# Altium PCB PCB2.PcbDoc
Units mil, origin at the board's own origin, x right, y up, seen from the top; angles counter-clockwise.
Board outline 6000 x 4000 mil, 2 copper layers (Top Layer, Bottom Layer); 53 components, 60 nets, 237 pads, 43 vias.
Unrouted connection lines stored in the file: 27.
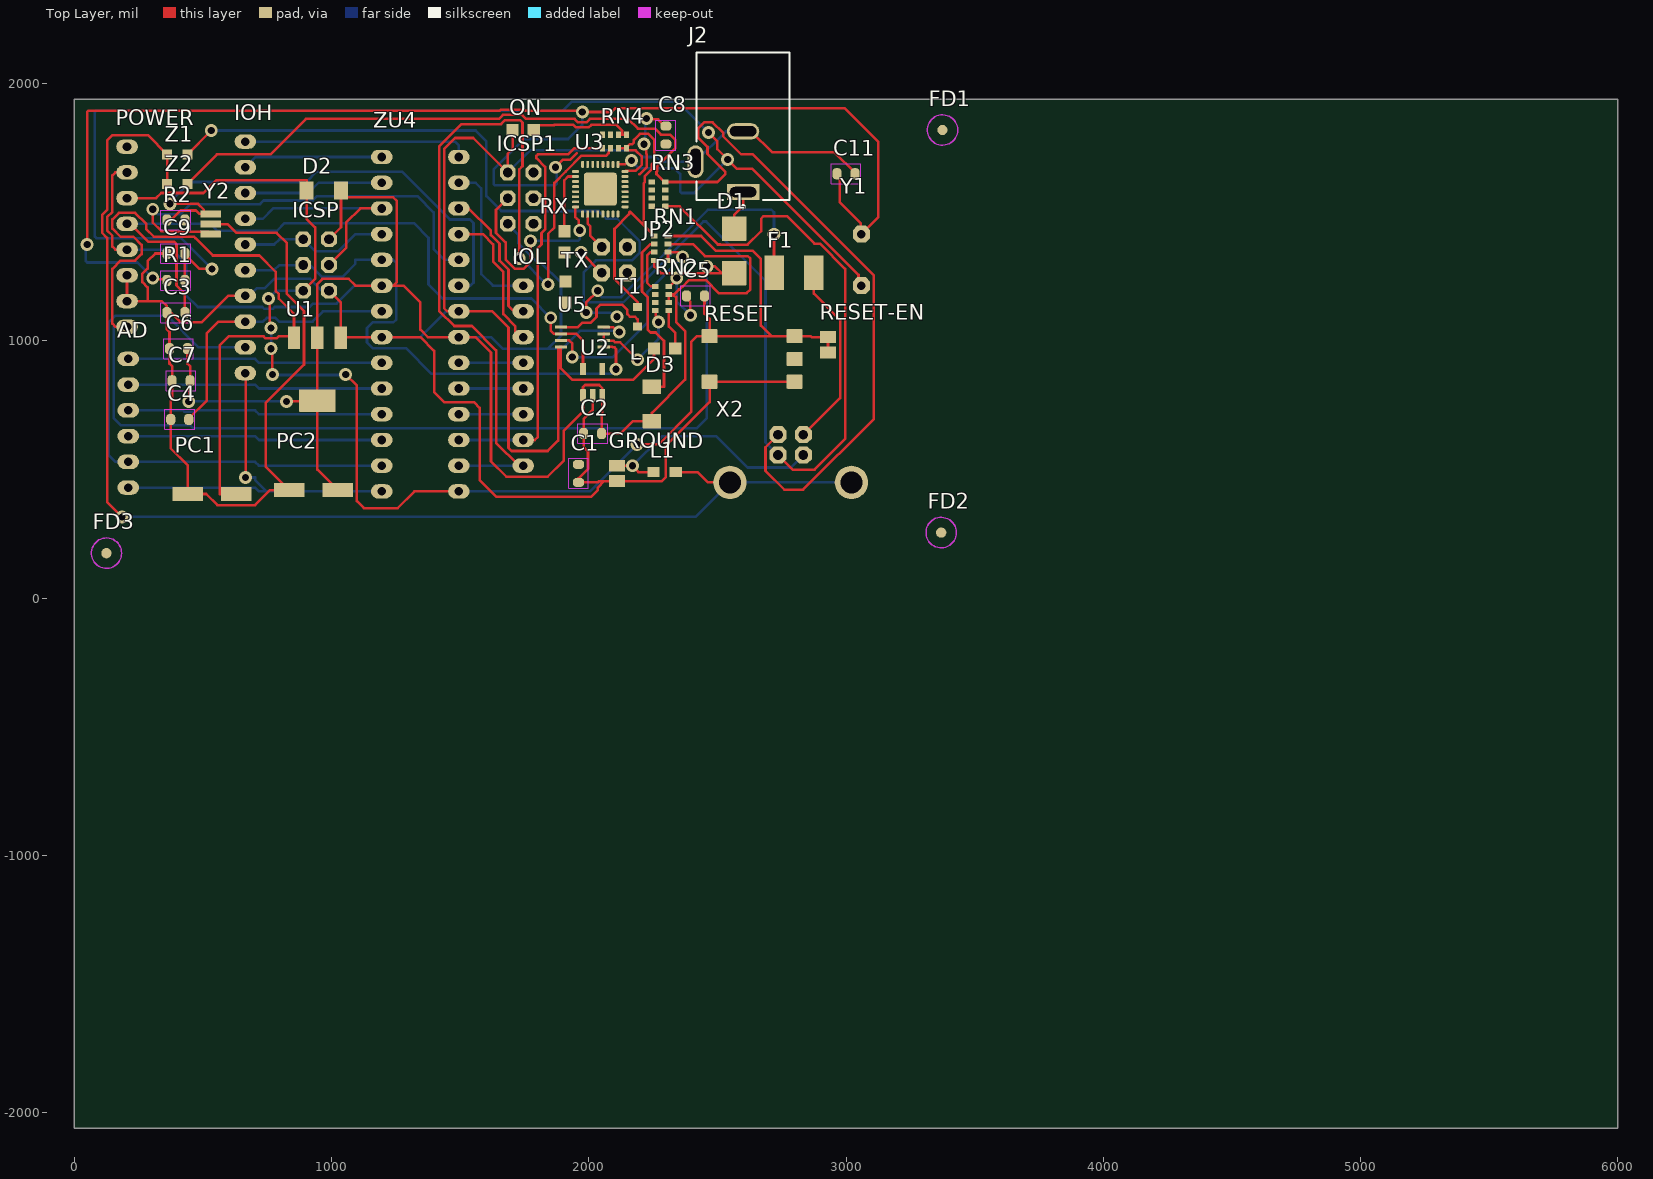
[diagram p0: Top Layer view]
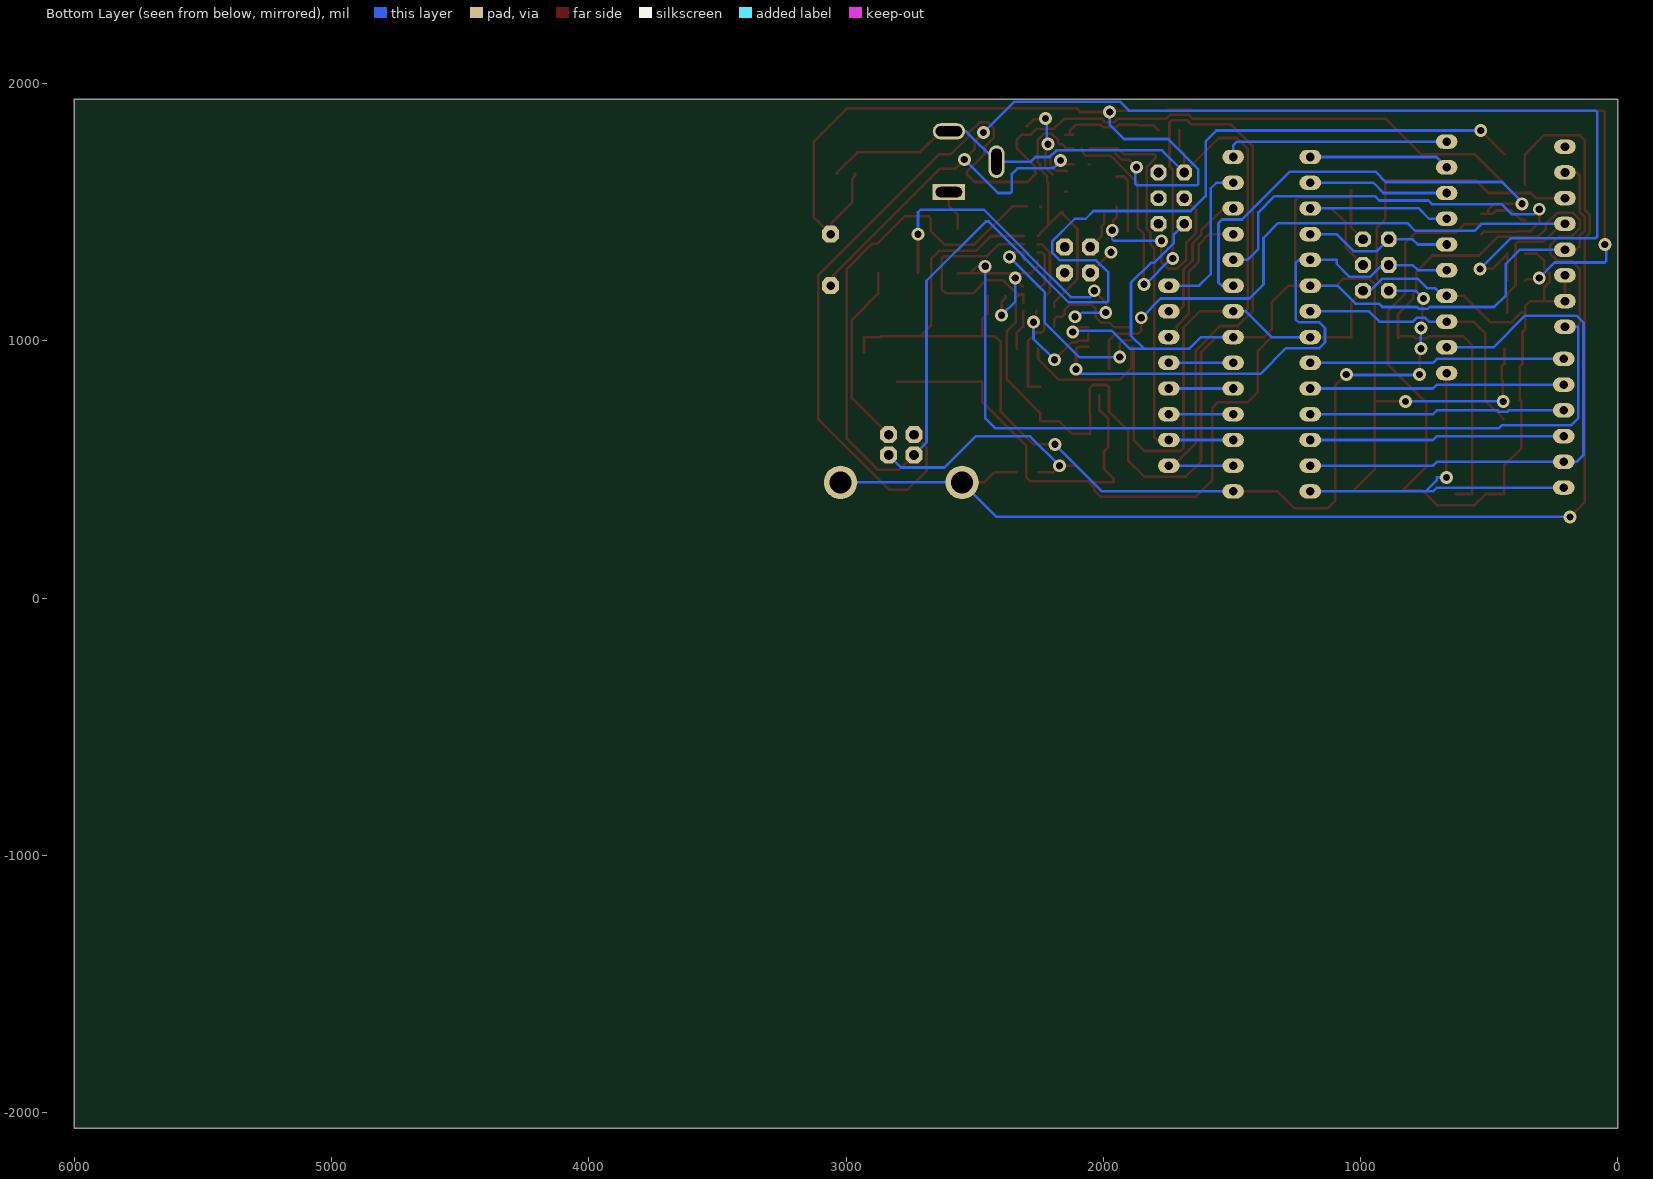
[diagram p1: Bottom Layer view, seen from below]

## Layer stack, top to bottom
Top Solder: solder mask 0.4, Solder Resist, Dk 3.5
Top Layer: signal copper 1.4
Dielectric 1: dielectric 12.6, FR-4, Dk 4.8
Bottom Layer: signal copper 1.4
Bottom Solder: solder mask 0.4, Solder Resist, Dk 3.5

## Board outline
0,-2060 6000,-2060 6000,1940 0,1940

## Design rules (kind name [scope] priority, off if disabled: settings)
Clearance [All] p1: gap=10 ignorepadtopadclearanceinfootprint=FALSE
PolygonConnect [All] p1: connectstyle=Relief reliefconductorwidth=10 reliefentries=4 polygonreliefangle="90 Angle" airgapwidth=10
RoutingVias [All] p1: holewidth=28 width=50 viastyle="Through Hole" minholewidth=28 minwidth=50 maxholewidth=28 maxwidth=50
SolderMaskExpansion [All] p1: expansion=0 istentingtop=FALSE
SupplyNets "Schematic Supply Nets_1" [InNet('+5V')] p1: voltage=0.000
SupplyNets "Schematic Supply Nets" [InNet('GND')] p2: voltage=0.000
Width [All] p1: maxlimit=10 minlimit=10 preferedwidth=10
30 further rules are at their usual default settings.

## Components (designator, comment, footprint, x,y, rotation, side; value= is the part's Value field where it differs from the comment)
AD "6x1F-H8.5" 1X06 210,680 r270 top
C1 "100n" C0603-ROUND 1960,485 r90 top
C2 "100n" C0603-ROUND 2015,640 r0 top
C3 "1u" C0603-ROUND 395,1110 r0 top
C4 "100n" C0603-ROUND 410,695 r0 top
C5 "100n" C0603-ROUND 2415,1175 r0 top
C6 "100n" C0603-ROUND 405,970 r0 top
C7 "100n" C0603-ROUND 415,845 r180 top
C8 "1u" C0603-ROUND 2300,1800 r90 top
C9 "22p" C0603-ROUND 395,1340 r180 top
C11 "22p" C0603-ROUND 3000,1650 r0 top
D1 "M7" SMB 2565,1350 r90 top
D2 "CD1206-S01575" MINIMELF 970,1585 r180 top
D3 "CD1206-S01575" MINIMELF 2245,755 r90 top
F1 "MF-MSMF050-2 500mA" L1812 2798.23,1265 r0 top
FD1 "FIDUCIALMOUNT" FIDUCIA-MOUNT 3375,1820 r0 top
FD2 "FIDUCIALMOUNT" FIDUCIA-MOUNT 3370,255 r0 top
FD3 "FIDUCIALMOUNT" FIDUCIA-MOUNT 125,175 r0 top
GROUND "SJ" SJ 2110,485 r90 top
ICSP "3x2 M" 2X03 940,1295 r270 top
ICSP1 "3x2 M" 2X03 1735,1555 r90 top
IOH "10x1F-H8.5" 1X10 665,1325 r270 top
IOL "8x1F-H8.5" 1X08 1745,865 r90 top
J2 "PJ-102A" FP-PJ-102A-MFG 2600,1834.69 r0 top
JP2 "2x2 M - NM" 2X02 2100,1315 r270 top
L "YELLOW" CHIP-LED0805 2295,970 r90 top
L1 "BLM21" 0805 2295,490 r0 top
ON "GREEN" CHIP-LED0805 1745,1820 r90 top
PC1 "47u" PANASONIC_D 535,405 r0 top
PC2 "47u" PANASONIC_D 930,420 r0 top
POWER "8x1F-H8.5" 1X08 205,1405 r270 top
R1 "1M" R0603-ROUND 395,1235 r180 top
R2 "1M" R0603-ROUND 395,1470 r0 top
RESET "TS42031-160R-TR-7260" TS42 2635,930 r180 top
RESET-EN "SJ" SJ 2930,985 r90 top
RN1 "10K" CAY16 2281.57,1360.75 r90 top
RN2 "1K" CAY16 2285,1165 r90 top
RN3 "22R" CAY16 2271.57,1570.75 r270 top
RN4 "1K" CAY16 2100,1775 r0 top
RX "YELLOW" CHIP-LED0805 1905,1385 r0 top
T1 "FDN340P" SOT-23 2150,1095 r270 top
TX "YELLOW" CHIP-LED0805 1910,1190 r0 top
U1 "NCP1117ST50T3G" SOT223 945,890 r180 top
U2 "LP2985-33DBVR" SOT23-DBV 2015,840 r0 top
U3 "ATMEGA16U2-MU(R)" MLF32 2045,1590 r270 top
U5 "LMV358IDGKR" MSOP08 1975,1015 r270 top
U$1 "DISCLAIMER" DISCLAIMER 13350,-1615 r90 top
X2 "USB-B_TH" PN61729 2785,450 r0 top
Y1 "16MHz" QS 3060,1315 r270 top
Y2 "CSTCE16M0V53-R0 16MHZ" RESONATOR 530,1454.37 r90 top
Z1 "CG0603MLC-05E" CT/CN0603 400,1725 r180 top
Z2 "CG0603MLC-05E" CT/CN0603 400,1610 r180 top
ZU4 "ATMEGA328P-PU" DIL28-3 1345,1065 r90 top

## Footprints (in the part's own frame and the unit in brackets; to place one, negate y for a bottom-side part, rotate by r counter-clockwise, add the part's x,y. Pads: shape width x height; smd on the part's side, far side on the other; paste and mask are expansions set on the pad)
1X06 [mil] "1X06"
  oval 56x84 / inner round 0 / far side oval 56x84 hole 33.46: 1(-250,0) 2(-150,0) 3(-50,0) 4(50,0) 5(150,0) 6(250,0)
1X08 [mil] "1X08"
  oval 56x84 / inner round 0 / far side oval 56x84 hole 33.46: 1(-350,0) 2(-250,0) 3(-150,0) 4(-50,0) 5(50,0) 6(150,0) 7(250,0) 8(350,0)
1X10 [mil] "1X10"
  oval 56x84 / inner round 0 / far side oval 56x84 hole 33.46: 1(-450,0) 2(-350,0) 3(-250,0) 4(-150,0) 5(-50,0) 6(50,0) 7(150,0) 8(250,0) 9(350,0) 10(450,0)
2X02 [mil] "2X02"
  oct 66x66 / inner round 0 / far side oct 66x66 hole 37.4: 1(-50,-50) 2(-50,50) 3(50,-50) 4(50,50)
2X03 [mil] "2X03"
  oct 61.02x61.02 / inner round 0 / far side oct 61.02x61.02 hole 37.4: 1(-100,-50) 2(-100,50) 3(0,-50) 4(0,50) 5(100,-50) 6(100,50)
0805 [mm] "0805"
  rrect5% 1.2x1 smd: 1(-1.1,0) 2(1.1,0)
C0603-ROUND [mil] "C0603-ROUND"
  rrect80% 35.37x43.31 smd: 1(-35,0) 2(35,0)
  Top Layer keep-out lines w2: -57.99,38.7 -57.99,-38.7 57.99,-38.7 57.99,38.7 -57.99,38.7
CAY16 [mm] "CAY16"
  rrect10% 0.5x0.65 smd: 1(-1.2,-0.675) 2(-0.4,-0.675) 3(0.4,-0.675) 4(1.2,-0.675) 5(1.2,0.675) 6(0.4,0.675) 7(-0.4,0.675) 8(-1.2,0.675)
CHIP-LED0805 [mil] "CHIP-LED0805"
  rrect4% 47.24x47.24 smd: A(0,-41.34) C(0,41.34)
CT/CN0603 [mm] "CT/CN0603"
  rrect5% 1x1 smd: 1(-1,0) 2(1,0)
DIL28-3 [mil] "DIL28-3"
  oval 56x84 / inner round 0 / far side oval 56x84 hole 33.46: 1(-650,-150) 2(-550,-150) 3(-450,-150) 4(-350,-150) 5(-250,-150) 6(-150,-150) 7(-50,-150) 8(50,-150) 9(150,-150) 10(250,-150) 11(350,-150) 12(450,-150) 13(550,-150) 14(650,-150) 15(650,150) 16(550,150) 17(450,150) 18(350,150) 19(250,150) 20(150,150) 21(50,150) 22(-50,150) 23(-150,150) 24(-250,150) 25(-350,150) 26(-450,150) 27(-550,150) 28(-650,150)
DISCLAIMER [mil] "DISCLAIMER"
FIDUCIA-MOUNT [mil] "FIDUCIA-MOUNT"
  rrect100% 40x40 smd: P$1(0,0)
  Top Layer keep-out circle w5: c0,0 r59.06
FP-PJ-102A-MFG [mm]
  rect 3.2x1.6 hole 1 slot 2.6 at 0 deg paste-2539.97 mask+0: 1(0,-6.5)
  rrect100% 3.2x1.6 hole 1 slot 2.6 at 0 deg paste-2539.97 mask+0: 2(0,-0.5)
  rrect100% 1.6x3.2 hole 2.6 slot 1 at 0 deg paste-2539.97 mask+0: 3(-4.7,-3.5)
  silkscreen extent -4.6,-8.07 4.6,7.3, body extent -5.6,-7.4 4.7,7.4, height 0.25
L1812 [mil] "L1812"
  rrect2% 74.8x133.86 smd: 1(-76.77,0) 2(76.77,0)
MINIMELF [mil] "MINIMELF"
  rrect3% 55.12x70.87 smd: A(66.93,0) C(-66.93,0)
MLF32 [mil] "MLF32"
  rrect80% 27.56x11.02 smd: 1(-96.46,68.9) 2(-96.46,49.21) 3(-96.46,29.53) 4(-96.46,9.84) 5(-96.46,-9.84) 6(-96.46,-29.53) 7(-96.46,-49.21) 8(-96.46,-68.9) 17(96.46,-68.9) 18(96.46,-49.21) 19(96.46,-29.53) 20(96.46,-9.84) 21(96.46,9.84) 22(96.46,29.53) 23(96.46,49.21) 24(96.46,68.9)
  rrect80% 11.02x27.56 smd: 9(-68.9,-96.46) 10(-49.21,-96.46) 11(-29.53,-96.46) 12(-9.84,-96.46) 13(9.84,-96.46) 14(29.53,-96.46) 15(49.21,-96.46) 16(68.9,-96.46) 25(68.9,96.46) 26(49.21,96.46) 27(29.53,96.46) 28(9.84,96.46) 29(-9.84,96.46) 30(-29.53,96.46) 31(-49.21,96.46) 32(-68.9,96.46)
  rrect15% 128.11x128.11 smd paste+0 mask+0: 33(0,0)
MSOP08 [mil] "MSOP08"
  rrect16% 11.81x47.24 smd: 1(-38.43,-83.19) 2(-12.83,-83.19) 3(12.76,-83.19) 4(38.35,-83.19) 5(38.35,83.15) 6(12.76,83.15) 7(-12.83,83.15) 8(-38.43,83.15)
PANASONIC_D [mm] "PANASONIC_D"
  rrect3% 3x1.4 smd: +(2.4,0) -(-2.4,0)
PN61729 [mil] "PN61729"
  oct 66x66 / inner round 0 / far side oct 66x66 hole 37.4: 1(49.21,185.43) 2(-49.21,185.43) 3(-49.21,106.69) 4(49.21,106.69)
  round 129.91 / inner round 0 / far side round 129.91 hole 86.61: P$1(-236.22,0) P$2(236.22,0)
QS [mil] "QS"
  oct 66x66 / inner round 0 / far side oct 66x66 hole 33.46: 1(-100,0) 2(100,0)
R0603-ROUND [mil] "R0603-ROUND"
  rrect80% 35.37x43.31 smd: 1(-35,0) 2(35,0)
  Top Layer keep-out lines w2: 57.99,38.7 57.99,-38.7 -57.99,-38.7 -57.99,38.7 57.99,38.7
RESONATOR [mm] "RESONATOR"
  rrect7% 0.7x2 smd: 1(-1,0) 2(0,0) 3(1,0)
SJ [mil] "SJ"
  rrect4% 46x63 smd: 1(-30,0) 2(30,0)
SMB [mil] "SMB"
  rrect2% 94.49x94.49 smd: A(86.61,0) C(-86.61,0)
SOT23-DBV [mil] "SOT23-DBV"
  rrect9% 21.65x47.24 smd: 1(-37.4,-51.18) 2(0,-51.18) 3(37.4,-51.18) 4(37.4,51.18) 5(-37.4,51.18)
SOT223 [mil] "SOT223"
  rrect4% 48x88 smd: 1(-91,-122) 2(0,-122) 3(91,-122)
  rrect2% 141.73x86.61 smd: 4(0,122.01)
SOT-23 [mil] "SOT-23"
  rrect6% 31x35 smd: 1(1,-40) 2(-37,40) 3(39,40)
TS42 [mil] "TS42"
  rrect15% 62.99x55.12 smd: 1(-165.35,88.58) 2(165.35,88.58) 3(-165.35,-88.58) 4(165.35,-88.58)
  rrect15% 62.99x55.12 smd paste+0: 5(-165.35,0)

## Part data
AD: library part PINHD-1X6, "PIN HEADER", DeviceSetName=PINHD-1X6, GateName_1=A, LibraryName=SmartPrj, SymbolName_1=PINHD6
C1 C2 C3 C4 C5 C6 C7 C8 C9 C11: library part C-EU0603-RND, "CAPACITOR, European symbol", DeviceName=0603-RND, DeviceSetName=C-EU, GateName_1=G$1, LibraryName=SmartPrj, SymbolName_1=C-EU
D1: library part DIODE-SMB, "DIODE", DeviceName=SMB, DeviceSetName=DIODE-, GateName_1=G$1, LibraryName=diode, SymbolName_1=D
D2 D3: library part DIODE-MINIMELF, "DIODE", DeviceName=MINIMELF, DeviceSetName=DIODE-, GateName_1=G$1, LibraryName=diode, SymbolName_1=D
F1: library part L-EUL1812, "INDUCTOR, European symbol", DeviceName=L1812, DeviceSetName=L-EU, GateName_1=G$1, LibraryName=rcl, SymbolName_1=L-EU
GROUND RESET-EN: "SMD solder JUMPER", DeviceSetName=SJ, GateName_1=1, LibraryName=jumper, SymbolName_1=SJ
ICSP ICSP1: library part PINHD-2X3, "PIN HEADER", DeviceSetName=PINHD-2X3, GateName_1=A, LibraryName=SmartPrj, SymbolName_1=PINH2X3
IOH: library part PINHD-1X10_ARD, "PIN HEADER", DeviceSetName=PINHD-1X10_ARD, GateName_1=A, LibraryName=SmartPrj, SymbolName_1=PINHD10
IOL POWER: library part PINHD-1X8, "PIN HEADER", DeviceSetName=PINHD-1X8, GateName_1=A, LibraryName=SmartPrj, SymbolName_1=PINHD8
J2: library part CMP-12637-106234071-1, "PJ-102A 2.0 x 6.5 mm, 2.5 A, Horizontal, Through Hole, Tapered Pins, Dc Power Jack Connector", Color=Black, Current Rating=2.5A, Flammability Rating="UL94 V-0", Insulation Resistance=50MΩ, Max Operating Temperature=85°C, Min Operating Temperature=-25°C, Voltage Rating=24V, Contact Gender=Male, Contact Material="Copper, Nickel, Tin", Contact Plating=Nickel, Diameter=2.1mm, Gender=Male, Height=11.2mm, Housing Color=Black, Housing Material=Thermoplastic, Inside Diameter=2mm, Lead Free="Lead Free", Lifecycle Status=Production, Mount="Through Hole", NexarPartId=106234071, Number of Conductors=2, Number of Contacts=3, Orientation=Horizontal, Outside Diameter=6.5mm, Packaging=Bulk, RoHS=Compliant, Schedule B="8536695050, 8536695050", Shielding=No, Termination="Through Hole", Voltage Rating (DC)=24V
JP2: library part PINHD-2X2, "PIN HEADER", DeviceSetName=PINHD-2X2, GateName_1=A, LibraryName=SmartPrj, SymbolName_1=PINH2X2
L ON RX TX: library part LEDCHIP-LED0805, "LED   OSRAM: - CHIPLED LG R971, LG N971, LY N971, LG Q971, LY Q971, LO R971, LY R971 LH N974, LH R974 LS Q976, LO Q976, LY Q976 LO Q996 - Hyper CHIPLED LW Q18S LB Q993, LB Q99A, LB R99A - SideLED LS A670, LO A670, LY A670, LG A670, LP A670 LB A673, LV A673, LT A673, LW A673 LH A674 LY A675 LS A676, LA A676, LO A676, LY A676, LW A676 LS A679, LY A679, LG A679 -  Hyper Micro SIDELEDÂ® LS Y876, LA Y876, LO Y876, LY Y876 LT Y87S - SmartLED LW L88C, LW L88S LB L89C, LB L89S, LG L890 LS L89K, LO L89K, LY L89K LS L896, LA L896, LO L896, LY L896 - TOPLED LS T670, LO T670, LY T670, LG T670, LP T670 LSG T670, LSP T670, LSY T670, LOP T670, LYG T670 LG T671, LOG T671, LSG T671 LB T673, LV T673, LT T673, LW T673 LH T674 LS T676, LA T676, LO T676, LY T676, LB T676, LH T676, LSB T676, LW T676 LB T67C, LV T67C, LT T67C, LS T67K, LO T67K, LY T67K, LW E67C LS E67B, LA E67B, LO E67B, LY E67B, LB E67C, LV E67C, LT E67C LW T67C LS T679, LY T679, LG T679 LS T770, LO T770, LY T770, LG T770, LP T770 LB T773, LV T773, LT T773, LW T773 LH T774 LS E675, LA E675, LY E675, LS T675 LS T776, LA T776, LO T776, LY T776, LB T776 LHGB T686 LT T68C, LB T68C - Hyper Mini TOPLEDÂ® LB M676 - Mini TOPLED SantanaÂ® LG M470 LS M47K, LO M47K, LY M47K    Source: http://www.osram.convergy.de   LUXEON: - LUMILEDÂ® LXK2-PW12-R00, LXK2-PW12-S00, LXK2-PW14-U00, LXK2-PW14-V00 LXK2-PM12-R00, LXK2-PM12-S00, LXK2-PM14-U00 LXK2-PE12-Q00, LXK2-PE12-R00, LXK2-PE12-S00, LXK2-PE14-T00, LXK2-PE14-U00 LXK2-PB12-K00, LXK2-PB12-L00, LXK2-PB12-M00, LXK2-PB14-N00, LXK2-PB14-P00, LXK2-PB14-Q00 LXK2-PR12-L00, LXK2-PR12-M00, LXK2-PR14-Q00, LXK2-PR14-R00 LXK2-PD12-Q00, LXK2-PD12-R00, LXK2-PD12-S00 LXK2-PH12-R00, LXK2-PH12-S00 LXK2-PL12-P00, LXK2-PL12-Q00, LXK2-PL12-R00    Source: www.luxeon.com   KINGBRIGHT:   KA-3528ASYC Source: www.kingbright.com", DeviceName=CHIP-LED0805, DeviceSetName=LED, GateName_1=G$1, LibraryName=led, SymbolName_1=LED
L1: library part WE-CBF_0805, "SMD EMI Suppression Ferrite Beads - excellent anti-EMI properties - low DCR - impedances till 3000 ohms - rated current up to 6 A", DeviceName=_0805, DeviceSetName=WE-CBF, GateName_1=G$1, LibraryName=wuerth-elektronik, SymbolName_1=L
PC1 PC2: library part CPOL-EUD, "POLARIZED CAPACITOR, European symbol", +=+, DeviceName=D, DeviceSetName=CPOL-EU, GateName_1=G$1, LibraryName=rcl, SymbolName_1=CPOL
R1 R2: library part R-EU_R0603, "RESISTOR, European symbol", DeviceName=R0603, DeviceSetName=R-EU_, GateName_1=G$1, LibraryName=SmartPrj, SymbolName_1=R-EU
RESET: library part TS42, "TS42 Dongnan Electronics Tact switch VDC 12V - 50mA", DeviceSetName=TS42, GateName_1=G$1, LibraryName=SmartPrj, SymbolName_1=ST-MOD_V1.4_TS42
RN1 RN2 RN3 RN4: library part 4R-NCAY16, "Array Chip Resistor   Source: RS Component / Phycomp", DeviceName=CAY16, DeviceSetName=4R-N, GateName_1=A, GateName_2=B, GateName_3=C, GateName_4=D, LibraryName=resistor-dil, SymbolName_1=R1NV, SymbolName_2=R1NV, SymbolName_3=R1NV, SymbolName_4=R1NV
T1: library part PMOSSOT23, "MOS FET", DeviceSetName=PMOSSOT23, GateName_1=A, LibraryName=zetex, SymbolName_1=P_MOSFET
U1: library part MC33269ST*, "Adjustable Output Low Dropout Voltage Regulator 800 mA   Source: http://www.onsemi.com/pub/Collateral/MC33269-D.PDF", DeviceSetName=MC33269ST*, GateName_1=G$1, LibraryName=linear, SymbolName_1=VREG-O2
U2: library part LP2985-XXDBVR, "ULTRALOW-POWER 50-mA LOW-DROPOUT LINEAR REGULATORS   50-mA Low-Dropout Regulator Source: http://focus.ti.com/lit/ds/symlink/tps77001.pdf", DeviceSetName=LP2985-XXDBVR, GateName_1=G$1, LibraryName=SmartPrj, SymbolName_1=LP2985-XXDBVR
U3: library part ATMEGA16U2-MU, DeviceName=MU, DeviceSetName=ATMEGA16U2-, GateName_1=G$1, LibraryName=SmartPrj, SymbolName_1=ATMEL_MEGA8U2
U5: library part LMV358?*MM, "Dual General Purpose, Low Voltage, Rail-to-Rail Output Operational Amplifiers   Source: http://www.national.com/mpf/LM/LMV321.html http://www.national.com/dt/lmv_qual.pdf", DeviceName=MM, DeviceSetName=LMV358?*, GateName_1=A, GateName_2=B, GateName_3=P, LibraryName=linear, SymbolName_1=OPAMP, SymbolName_2=OPAMP, SymbolName_3=PWR+-, V+=V+, V-=V-
X2: library part PN61729, "BERG USB connector", DeviceSetName=PN61729, GateName_1=G$1, LibraryName=SmartPrj, SymbolName_1=J11, USB=USB
Y1: library part XTAL/S, "CRYSTAL", DeviceSetName=XTAL/S, GateName_1=G$1, LibraryName=SmartPrj, SymbolName_1=XTAL
Y2: library part RESONATORMU, DeviceName=MU, DeviceSetName=RESONATOR, GateName_1=G$1, LibraryName=SmartPrj, SymbolName_1=RESONATOR
Z1 Z2: library part VARISTORCN0603, "VARISTOR", DeviceName=CN0603, DeviceSetName=VARISTOR, GateName_1=G$1, LibraryName=varistor, SymbolName_1=VARISTOR
ZU4: "MICROCONTROLLER   4 Kbytes FLASH   128 bytes SRAM   256 bytes EEPROM   UART   6-channel 10 bit ADC", DeviceName=PU, DeviceSetName=ATMEGA328P-, GateName_1=G$1, LibraryName=SmartPrj, SymbolName_1=20-I/O-2
FD1 FD2 FD3: DeviceSetName=FIDUCIALMOUNT, GateName_1=G$1, LibraryName=SmartPrj, SymbolName_1=FIDUCIAL
U$1: ARDUINOisaregisteredtrademark.="ARDUINO is a registered trademark.", Arduinomaymakechangestospecificationsandproductdescriptionsatanytime,withoutnotice.TheCustomermustnot="Arduino may make changes to specifications and product descriptions at any time, without notice. The Customer must not", DeviceSetName=DISCLAIMER, GateName_1=G$1, LibraryName=SmartPrj, ReferenceDesignsAREPROVIDED"ASIS"AND"WITHALLFAULTS.ArduinoDISCLAIMSALLOTHERWARRANTIES,EXPRESSORIMPLIED,="Reference Designs ARE PROVIDED \"AS IS\" AND \"WITH ALL FAULTS. Arduino DISCLAIMS ALL OTHER WARRANTIES, EXPRESS OR IMPLIED,", REGARDINGPRODUCTS,INCLUDINGBUTNOTLIMITEDTO,ANYIMPLIEDWARRANTIESOFMERCHANTABILITYORFITNESSFORAPARTICULARPURPOSE="REGARDING PRODUCTS, INCLUDING BUT NOT LIMITED TO, ANY IMPLIED WARRANTIES OF MERCHANTABILITY OR FITNESS FOR A PARTICULAR PURPOSE", relyontheabsenceorcharacteristicsofanyfeaturesorinstructionsmarked"reserved"or"undefined."Arduinoreserves="rely on the absence or characteristics of any features or instructions marked \"reserved\" or \"undefined.\" Arduino reserves", SymbolName_1=DISCLAIMER, TheproductinformationontheWebSiteorMaterialsissubjecttochangewithoutnotice.Donotfinalizeadesignwiththisinformation.="The product information on the Web Site or Materials is subject to change without notice. Do not finalize a design with this information.", theseforfuturedefinitionandshallhavenoresponsibilitywhatsoeverforconflictsorincompatibilitiesarisingfromfuturechangestothem.="these for future definition and shall have no responsibility whatsoever for conflicts or incompatibilities arising from future changes to them."

## Via types
v1: diameter 50, hole 28, Top Layer to Bottom Layer, 43 vias

## Nets (pads, with @x,y where several pads share a name; then routed paths per layer and width w, separated by ;. In a path a pad name is that pad's centre, name@x,y a point inside that pad or via, vN(x,y) a via of type N, cw(c..) or ccw(c..) an arc to the next point about the centre after c; other vN are vias at no path point)
+3V3: C3.2 POWER.4 U2.5 U5.2 | length 2736
  Top Layer w10: POWER.4 219,1455 289,1385 388.7,1385 397.32,1376.39 397.32,1215.42 430,1182.73 C3.2 ; v1(1852,1090) 1852,1040 1864.17,1027.83 U5.2 1951.77,1027.83 1977.6,1002 U2.5
  Bottom Layer w10: POWER.4 530,1455 557,1428 787,1428 817,1458 1320,1458 1377,1401 1377,1220 1432,1165 1777,1165 v1(1852,1090)
+5V: C1.2 C2.2 C6.2 C7.1 D2.C D3.C ICSP1.2 ICSP.2 PC2.+ POWER.2 POWER.5 RN1.3 RN1.5 RN2.2 RN2.3 RN4.3 RN4.4 T1.2 U1.2 U1.4 U2.1 U2.3 U3.4 U3.32 U5.8 ZU4.7 ZU4.20 | length 10403
  Top Layer w10: POWER.5 160,1355 148,1367 148,1408.9 128,1428.9 128,1481.1 148,1501.1 148,1643 160,1655 POWER.2 ; C6.2 440,912 450,902 C7.1 447.5,842.5 447.5,767.5 v1(445,765) ; v1(825,765) 942.01,765 U1.4 ; ICSP.2 1036.93,1441.93 D2.C@1036.93,1558 ; PC2.+ 945,499.49 U1.4 ; D2.C D2.C@1036.93,1558 ; U3.4 U3.4@2055.67,1687.29 ; U5.8 2094.3,1053.43 2113.11,1034.62 v1(2118.64,1034.62) ; RN4.3 RN4.4 ; U3.32 2143.48,1660.92 2182.51,1660.92 2205.94,1684.35 2205.94,1717.49 2182.51,1740.92 2147.24,1740.92 RN4.4 ; T1.2 2190,1151 2100,1241 2100,1436 2157.07,1493.07 2157.07,1498.79 2160.64,1502.35 2214,1448.99 ; RN1.5 2252.05,1407.99 2247.2,1412.84 2247.2,1415.78 2214,1448.99 ; RN1.3 2405.23,1376.5 2451.73,1330 2618,1330 2628,1320 2628,1200 2614,1186 2505,1186 2455,1236 2389.7,1236 2365.36,1211.65 2364.39,1211.65 2352.73,1200 2350,1200 2330.75,1180.75 RN2.3 ; RN2.2 RN2.3 ; U1.4 U1.2 944,1012 944,1220 965,1241 1067,1241 1093,1215 ZU4.20 1240,1215 ; D2.C@1036.93,1558 1240,1558 1254,1544 1254,1229 1240,1215 ; 1240,1215 1280,1215 1345,1150 1345,1044 1374,1015 ZU4.7 1560,1015 1620,955 1620,532 1680,472 1840,472 1902,534 1902,649.4 1977.6,725 U2.1 1977.6,820.6 1985.65,828.65 2040,828.65 2052.4,816.25 U2.3 2052.4,715.4 2050,713 C2.2 2123,640 2171.07,688.07 D3.C 2245,720 2375,850 2375,1038 2340,1073 2340,1170.75 RN2.3 ; RN4.4 2147.24,1751.38 2161.02,1765.16 2169.14,1765.16 2175,1771.02 2175,1781.57 2198.43,1805 2231.57,1805 2255,1781.57 2255,1696.02 2245.94,1686.96 2245.94,1667.79 2217.2,1639.05 2217.2,1616.44 2214,1613.24 2214,1448.99
  Bottom Layer w10: POWER.5 380,1355 435,1300 435,1177 480,1132 731.43,1132 738.43,1125 771.57,1125 778.57,1132 915,1132 928,1145 1020,1145 1090,1215 ZU4.20 ; v1(445,765) v1(825,765) ; ZU4.7 1620,1015 1665,970 1842,970 ; ICSP1.2 1725.44,1414.56 1725.44,1381.1 1746.54,1360 1802.74,1303.83 1814.74,1303.83 1892,1226.57 1892,1020 1842,970 ; v1(2118.64,1034.62) 2114.26,1039 1966.6,1039 1897.6,970 1842,970
AD0: AD.1 ZU4.23 | length 991.2
  Bottom Layer w10: AD.1 703,930 718,915 ZU4.23
AD1: AD.2 ZU4.24 | length 991.2
  Bottom Layer w10: AD.2 703,830 718,815 ZU4.24
AD2: AD.3 ZU4.25 | length 995.4
  Bottom Layer w10: AD.3 423.43,730 428.43,725 461.57,725 466.57,730 703,730 718,715 ZU4.25
AD3: AD.4 ZU4.26 | length 991.2
  Bottom Layer w10: AD.4 703,630 718,615 ZU4.26
AD4/SDA: AD.5 IOH.9 ZU4.27 | length 2187.5
  Bottom Layer w10: IOH.9 483,975 360,1098 160,1098 133,1071 133,557 160,530 AD.5 703,530 718,515 ZU4.27
AD5/SCL: AD.6 IOH.10 ZU4.28 | length 1507.9
  Top Layer w10: IOH.10 666,875 v1(666,469)
  Bottom Layer w10: AD.6 703,430 718,415 748,415 ; v1(666,469) 703,469 703,460 748,415 ; ZU4.28 748,415
AREF: C4.2 IOH.8 ZU4.21 | length 1091.6
  Top Layer w10: C4.2 445,698.97 515,768.97 515,1030 560,1075 IOH.8
  Bottom Layer w10: IOH.8 733.43,1075 748.43,1090 781.57,1090 796.57,1075 926,1075 966,1115 ZU4.21
CMP: RN1.1 RN1.2 U5.3 | length 858.3
  Top Layer w10: U5.3 1923.76,1002.24 1936,990 v1(1936,937) ; RN1.1 RN1.2 2347,1345 v1(2365,1327)
  Bottom Layer w10: v1(1936,937) 2094,937 2227.17,1070.17 2227.17,1189.17 v1(2365,1327)
D+: RN3.5 X2.3 Z1.1 | length 6053.5
  Top Layer w10: Z1.1 v1(532.37,1818) ; RN3.5 2353.49,1523.51 2502,1375 2511.46,1375 2512.1,1374.36 2617.9,1374.36 2670,1426.46 2670,1475 2680,1485 2770,1485 2876.64,1378.36 2898.36,1378.36 2997,1279.72 2997,619.56 2877.44,500 2792.48,500 X2.3
  Bottom Layer w10: v1(532.37,1818) 1560,1818 1602,1776 1602,1563 1660,1505 2038,1505 2068,1475 2110.71,1475 2198,1387.71 2198,1342.29 2168.71,1313 2027.29,1313 1980,1265.71 1980,1155.86 1985.86,1150 2134,1150 2313.39,1329.4 2313.39,1331.96 2445.79,1464.36 2456.64,1464.36 2687,1234 2687,605.48 X2.3
D-: RN3.8 X2.2 Z2.1 | length 4968.1
  Top Layer w10: Z2.1 554.37,1725 762,1725 900,1863 1650.48,1863 1666.1,1878.62 1741.22,1878.62 1756.84,1863 1945.43,1863 1958.43,1850 1991.57,1850 2004.57,1863 2153,1863 2191,1825 2239.85,1825 2257.73,1825 2280.42,1802.31 2314.95,1802.31 2336.66,1780.61 2336.66,1749.39 2265.94,1678.68 2265.94,1659.5 2263.36,1656.92 2263.36,1648.64 2294.01,1617.99 RN3.8 2499.99,1617.99 2531,1649 2531,1657.43 2461.46,1726.98 2461.46,1754.33 2425,1790.78 2425,1826.57 2448.43,1850 2481.57,1850 2522.01,1809.56 2522.01,1795.74 2592.75,1725 2638.28,1725 3108,1255.28 3108,697 2833,422 2760,422 2687,495 2687,586.64 X2.2
DTR: C5.1 RN2.4 U3.13 | length 294.6
  Top Layer w10: RN2.4 2314.52,1212.24 2341.81,1239.53 v1(2341.81,1244.67) ; C5.1 2380,1166.08 2395,1151.08 v1(2395,1100)
  Bottom Layer w10: v1(2341.81,1244.67) 2341.81,1153.19 v1(2395,1100)
GATE_CMD: T1.3 U5.1 | length 414.5
  Top Layer w10: U5.1 1957.43,1053.43 1974,1070 2006.57,1070 2030,1093.43 2030,1126 2045,1141 2129,1141 2150,1120 2150,1104 2160,1094 2180,1094 2190,1084 T1.3
GND: C1.1 C2.1 C3.1 C4.1 C6.1 C7.2 C9.2 C11.2 GROUND.1 ICSP1.6 ICSP.6 IOH.7 J2.2 J2.3 L.C ON.C PC1.- PC2.- POWER.6 POWER.7 RESET.1 RESET.2 RN1.7 RN2.5 U1.1 U2.2 U3.3 U3.33 U5.4 Y2.2 ZU4.8 ZU4.22 | length 12167.2
  Top Layer w10: POWER.6 POWER.7 285,1155 ; C9.2 315,1340 285,1310 285,1281.57 265,1261.57 265,1228.43 285,1208.43 285,1155 ; Y2.2 596,1454.37 630.37,1420 786,1420 826,1380 826,1183 893,1116 893,908 745,760 745,510.51 PC2.- ; IOH.7 598,1175 496,1073 413,1073 376,1110 C3.1 ; PC2.-@835,420 761,420 703,362 556,362 513,405 PC1.- 440.51,517 375,582.51 C4.1 375,767 380,772 C7.2 380,902 370,912 C6.1 370,1035 360,1045 C3.1 ; ICSP.6 1036,1149 U1.1@1036,1015 ; U1.1 U1.1@1036,1015 ; ON.C 1703.66,1746.66 1685,1728 ICSP1.6 1551,1789 1480,1789 1438,1747 1438,1127 1450,1115 ZU4.8 1625,1115 1688,1052 1688,584 1700,572 1840,572 1881,613 1881,970.65 1887,976.65 U5.4@1891,976.65 ; U5.4 U5.4@1891,976.65 ; U2.2 2015,731 1980,696 C2.1 1980,588 1997,571 1997,503 1960,466 C1.1 2035,450 2040,455 2060,455 ; L.C 2253.66,930.49 2172.17,849 1937,849 1891,895 U5.4@1891,976.65 ; RN1.7 2240,1345 2227,1332 2227,1226.24 2241,1212.24 RN2.5 ; J2.2 2631.5,1815 2713.56,1732.93 2956.04,1732.93 3035,1653.97 C11.2 ; RESET.1 RESET.2 2469.65,762.15 2299,591.5 2299,470 2284,455 GROUND.1 2060,455 ; 285,1155 340,1155 360,1135 C3.1 ; U1.1@1036,1015 ZU4.22 1345,1015 1399,961 1399,802 1440,761 1555,761 1576,740 1576,459 1640,395 2010,395 2035,420 2035,430 2060,455
  Bottom Layer w10: IOH.7 679.81,1175 709.81,1205 741,1205 777,1241 917,1241 963,1195 ICSP.6 ; ZU4.22 1345,1015 1445,1115 ZU4.8 ; ICSP1.6 1770.92,1740.92 2182.51,1740.92 2208.43,1715 2264,1715 2283,1696 2414.96,1696 J2.3 2533.07,1815 J2.2
IO0: IOL.1 RN4.2 ZU4.2 | length 3418.8
  Top Layer w10: v1(1730,1320) 1730.51,1320.51 1730.51,1667.49 1742.28,1679.26 1742.28,1849.28 1732.94,1858.62 1674.38,1858.62 1658.76,1843 1505.72,1843 1418,1755.28 1418,1117.19 1477.19,1058 1545.28,1058 1640,963.28 1640,603.72 1728.72,515 IOL.1 ; v1(1842,1220) 1842,1416.74 1866.38,1441.12 1866.38,1614.3 1910.51,1658.43 1910.51,1658.79 1972.35,1720.64 2068.24,1720.64 2077.61,1730 2077.61,1734.78 2079.41,1736.58 2079.41,1743.59 RN4.2
  Bottom Layer w10: ZU4.2 IOL.1 ; v1(1730,1320) 1736,1320 1836,1220 v1(1842,1220)
IO1: IOL.2 RN4.1 ZU4.3 | length 1699.7
  Top Layer w10: IOL.2 1790,615 1802,627 1802,1360.69 1816.26,1374.95 1816.26,1419.28 1830.51,1433.53 1830.51,1676.47 1796.12,1710.86 1796.12,1719.14 1801.98,1725 1920.15,1725 1944.53,1749.38 1970.91,1749.38 1971.86,1748.43 RN4.1
  Bottom Layer w10: ZU4.3 IOL.2
IO2: IOL.3 ZU4.4 | length 250
  Bottom Layer w10: ZU4.4 IOL.3
IO3: IOL.4 ZU4.5 | length 250
  Bottom Layer w10: ZU4.5 IOL.4
IO4: IOL.5 ZU4.6 | length 250
  Bottom Layer w10: ZU4.6 IOL.5
IO5: IOL.6 ZU4.11 | length 575.7
  Top Layer w10: ZU4.11 1588.14,1415 1628.07,1375.07 1628.07,1308.79 1668,1268.86 1668,1104 1715,1057 1715,1015 IOL.6
IO6: IOL.7 ZU4.12 | length 546.9
  Top Layer w10: ZU4.12 1533,1515 1619.49,1428.51 1619.49,1411.93 1653.03,1378.39 1653.03,1312.12 1688,1277.15 1688,1136 1709,1115 IOL.7
IO7: IOL.8 ZU4.13 | length 610.8
  Bottom Layer w10: ZU4.13 1560,1615 1582,1593 1582,1260 1627,1215 IOL.8
IO8: IOH.1 ZU4.14 | length 881.2
  Bottom Layer w10: IOH.1 1480,1775 1495,1760 ZU4.14
IO9: IOH.2 ZU4.15 | length 546.6
  Bottom Layer w10: IOH.2 705,1715 ZU4.15
L13: RN2.8 U5.6 U5.7 | length 419.6
  Top Layer w10: U5.7 U5.6 2059.05,1001.34 2095.36,1001.34 2102.07,994.62 2122.38,994.62 v1(2190,927) ; RN2.8 2261,1117.76 2261,1083 v1(2271,1073)
  Bottom Layer w10: v1(2190,927) 2271,1008 v1(2271,1073)
M8RXD: RN4.7 U3.9
M8TXD: RN4.8 U3.8
MISO: ICSP.1 IOH.5 ZU4.18 | length 584.7
  Bottom Layer w10: IOH.5 777,1375 797,1395 ICSP.1 936,1349 1027,1349 1093,1415 ZU4.18
MISO2: ICSP1.1 U3.17
MOSI: ICSP.4 IOH.4 ZU4.17 | length 900.1
  Top Layer w10: ICSP.4 1057,1362 1057,1460 1112,1515 ZU4.17
  Bottom Layer w10: IOH.4 733,1475 773,1515 ZU4.17
MOSI2: ICSP1.4 U3.16 | length 805.1
  Top Layer w10: ICSP1.4 1639.49,1509.49 1639.49,1420.22 1676.46,1383.24 1676.46,1316.97 1713.43,1280 1746.57,1280 1773.92,1307.35 v1(1773.92,1389.18) ; U3.16 1948.03,1520.59 1948.03,1480.86 1953.89,1475 1954.22,1475 1961.72,1467.5 1961.72,1433.28 v1(1965,1430)
  Bottom Layer w10: v1(1773.92,1389.18) 1959.14,1389.18 1965,1395.04 v1(1965,1430)
NetL_A: L.A RN2.1 | length 158
  Top Layer w10: RN2.1 2311.57,1055.77 2336.34,1031 L.A
NetON_A: ON.A RN4.5 RN4.6 | length 417.7
  Top Layer w10: ON.A 1804.02,1837.68 1864.13,1837.68 1866.45,1840 1940.15,1840 1950.15,1830 1999.85,1830 2009.85,1840 2108,1840 2131,1817 2131,1801.57 ; RN4.6 2131,1801.57 ; RN4.5 2131,1801.57
NetRN2_6: RN2.6 TX.A
NetRN2_7: RN2.7 RX.A
PB4: JP2.1 U3.18 | length 151
  Top Layer w10: U3.18 1995.79,1455.78 2005,1446.57 2005,1410 JP2.1
PB5: JP2.3 U3.19 | length 123.9
  Top Layer w10: v1(1970,1345) JP2.3
  Bottom Layer w10: v1(1970,1345) v1@1970,1355.71
PB6: JP2.2 U3.20
PB7: JP2.4 U3.21
PWRIN: D1.A J2.1 | length 156.7
  Top Layer w10: D1.A 2565,1490 2600,1525 J2.1
RD+: RN3.4 U3.29 | length 6
  Top Layer w10: RN3.4@2240.74,1519.26 RN3.4
RD-: RN3.1 U3.30
RESET: C5.2 D2.A ICSP.5 POWER.3 RESET-EN.1 RESET-EN.2 RESET.3 RESET.4 RN1.4 ZU4.1 | length 5656.9
  Top Layer w10: POWER.3 318,1555 338,1575 502,1575 552,1625 903.07,1625 D2.A 903.07,1473.93 936,1441 936,1241 ICSP.5 ; v1(755,1165) 760,1160 760,1055 v1(765,1050) ; v1(765,970) 770,965 770,870 v1(770.72,869.28) ; v1(1055,870) 1098.55,826.45 1098.55,377.31 1125.86,350 1257.38,350 1322.38,415 ZU4.1 ; v1(2188,598) 2272,598 2399,725 2399,997.58 2420,1018.58 RESET.4 ; RN1.4 2437,1407.99 2494.99,1350 2638,1350 2669,1319 2669,1060 2710.42,1018.58 ; C5.2 2450,1105.65 2469.65,1086 RESET.4 ; RESET-EN.1 RESET-EN.2 2866.58,1015 2863,1018.58 RESET.3 2710.42,1018.58 ; RESET.4 2710.42,1018.58
  Bottom Layer w10: v1(755,1165) 785,1195 ICSP.5 ; v1(765,970) v1(765,1050) ; v1(770.72,869.28) 772.5,867.5 1052.5,867.5 v1(1055,870) ; ZU4.1 2005,415 v1(2188,598)
RESET2: D3.A ICSP1.5 RN1.6 U3.24 | length 677.7
  Top Layer w10: D3.A 2292.57,821.93 2292.57,1000.43 2260.09,1032.91 2240,1032.91 2229.9,1043.01 2229.9,1169.1 2207,1192 2207,1343 2240.5,1376.5 RN1.6
RXLED: RX.C U3.10 | length 247.9
  Top Layer w10: RX.C 1905,1624.64 1919.57,1639.21 U3.10
SCK: ICSP.3 IOH.6 U5.5 ZU4.19 | length 2214.4
  Top Layer w10: U5.5 2091.76,976.65 2093.78,974.62 2100.14,974.62 2106,968.77 v1(2106,890)
  Bottom Layer w10: IOH.6 777,1275 797,1295 ICSP.3 917,1295 963,1249 1042,1249 1093,1300 1093,1315 ZU4.19 1240,1315 1252,1303 1252,1084 1240,1072 1160,1072 1138,1050 1138,994 1160,972 1289,972 1389,872 2088,872 v1(2106,890)
SCK2: ICSP1.3 U3.15
SS: IOH.3 ZU4.16 | length 546.6
  Bottom Layer w10: IOH.3 910,1575 950,1615 ZU4.16
TP_VUCAP: C8.1 U3.27
TXLED: TX.C U3.11
UGND: C8.2 GROUND.2 L1.1 U3.28 X2.4 | length 1270.1
  Top Layer w10: GROUND.2 v1@2168,515 ; U3.28 U3.28@2150.16,1580.16 ; v1(2170,515) v1@2168,515 ; 2197.2,1647.33 2225.94,1676.07 2225.94,1725.77 2222.65,1729.06 2222.65,1757.35 v1(2215,1765) ; v1(2225,1865) 2228.97,1861.03 2270,1861.03 2296.03,1835 C8.2 ; L1.1 2193,490 v1@2168,515
  Bottom Layer w10: v1(2170,515) 2284,629 2496,629 2617,508 2785.52,508 X2.4 ; v1(2215,1765) 2220,1770 2220,1860 v1(2225,1865)
USBVCC: F1.1 T1.1 U3.31 | length 1313.6
  Top Layer w10: v1(1990,1110) 1990,1150 v1(2035,1195) ; v1(2720,1415) 2720,1266.46 F1.1
  Bottom Layer w10: v1(1990,1110) 2083.18,1110 2099.18,1094 v1(2110,1094) ; v1(2035,1195) 2035,1185 2050,1170 2125.71,1170 2293.39,1337.68 2293.39,1340.25 2463.15,1510 2710,1510 2720,1500 v1(2720,1415)
USHIELD: L1.2 X2.P$1 X2.P$2 Z1.2 Z2.2 | length 5009.3
  Top Layer w10: v1(185,316) 128,373 128,1400.62 108,1420.62 108,1489.38 128,1509.38 128,1779 149,1800 285.63,1800 Z1.2 Z2.2 ; L1.2 2423,490 2463,450 X2.P$1
  Bottom Layer w10: v1(185,316) 2414.78,316 X2.P$1 X2.P$2
VIN: D1.C PC1.+ POWER.8 RN1.8 U1.3 | length 6364.9
  Top Layer w10: POWER.8 160,1055 148,1067 148,1280 180,1312 236.81,1312 262,1337.19 262,1372.81 229.81,1405 180.19,1405 148,1437.19 148,1472.81 173.19,1498 236.81,1498 278.91,1455.91 278.91,1435.09 309,1405 466,1405 471.3,1399.7 539,1332 720,1332 783,1269 783,1193.57 795,1181.57 795,1164 854,1105 U1.3@854,1018 ; PC1.+ 566,405 566,984 600,1018 735.43,1018 743.43,1010 786.57,1010 794.57,1018 U1.3@854,1018 ; U1.3 U1.3@854,1018 ; RN1.8 2255,1289 2280.61,1263.39 2517,1263.39 ; v1(2459,1290) 2490.39,1290 2517,1263.39 ; D1.C 2517,1263.39
  Bottom Layer w10: POWER.8 153,1055 153,700 180,673 450,673 463,660 2419,660 2459,700 v1(2459,1290)
XT1: C9.1 R1.1 U3.1 Y1.2 | length 5133.9
  Top Layer w10: R1.1 C9.1 430,1336.03 486.03,1280 v1(535,1280) ; U3.1 2140.65,1686.46 2155.12,1700.92 v1(2165.94,1700.92) ; v1(2465,1810) 2499.79,1775.21 2499.79,1745.21 2575,1670 2635,1670 3048.5,1256.5 3048.5,1226.5 Y1.2
  Bottom Layer w10: v1(535,1280) 415,1400 85.86,1400 80,1405.86 80,1889.14 85.86,1895 1900,1895 1935,1930 2345,1930 v1(2465,1810) ; v1(2165.94,1700.92) 2196.12,1670.74 2333.4,1670.74 2355,1649.14 2355,1580.86 2360.86,1575 2410,1575 v1(2540,1705)
XT2: C11.1 R1.2 U3.2 Y1.1 | length 5674.4
  Top Layer w10: v1(50,1375) 50,1889.14 55.86,1895 1654.19,1895 1657.81,1898.62 1749.51,1898.62 1753.13,1895 1970,1895 v1(1975,1890) 2088.7,1890 2103.7,1905 2995,1905 3125,1775 3125,1480 Y1.1 3057.86,1417.14 3057.86,1457.14 2975,1540 2975,1631.08 2965,1641.08 C11.1 ; v1(305,1245) 310,1240 355,1240 R1.2 ; v1(1870.51,1675) 1870.51,1675.51 1900,1705 1928.43,1705 1952.82,1729.38
  Bottom Layer w10: v1(50,1375) 45,1370 45,1310.86 50.86,1305 245,1305 v1(305,1245) ; v1(1870.51,1675) 1875,1670.51 1875,1610.86 1869.14,1605 1635.86,1605 1630,1610.86 1630,1666.98 1748.02,1785 1920,1785 1974.18,1839.18 1974.18,1889.18 v1(1975,1890)
XTAL1: R2.1 Y2.3 ZU4.9 | length 1960.3
  Top Layer w10: R2.1 376,1470 413,1507 473,1507 486.26,1493.74 Y2.3@504,1493.74 ; v1(372,1533) 481,1533 504,1510 Y2.3@504,1493.74 ; Y2.3 Y2.3@504,1493.74
  Bottom Layer w10: v1(372,1533) 372,1540 450,1618 902,1618 942,1658 1274,1658 1460,1472 1538,1472 1552,1458 1552,1227 1540,1215 ZU4.9
XTAL2: R2.2 Y2.1 ZU4.10 | length 1708.7
  Top Layer w10: v1(305,1512) 305,1460 338.35,1426.65 398.35,1426.65 400,1425 489.77,1425 490.99,1423.78 521.22,1423.78 Y2.1
  Bottom Layer w10: v1(305,1512) 324.34,1492.66 412.26,1492.66 451.6,1532 722,1532 736,1546 927,1546 944,1563 1334,1563 1397,1500 1397,1358 1440,1315 ZU4.10
XUSB: F1.2 X2.1 | length 731
  Top Layer w10: X2.1 2977,778.22 2977,1081.89 2875,1183.89 F1.2
pads on no net: FD1.P$1 FD2.P$1 FD3.P$1 POWER.1 RESET.5 RN3.2 RN3.3 RN3.6 RN3.7 U2.4 U3.5 U3.6 U3.7 U3.12 U3.14 U3.22 U3.23 U3.25 U3.26

## Text inside footprints (layer, text, board x,y; h text height)
U1: Mechanical 7 "2" at 995.81,1060.37 h27.2 r180; Mechanical 7 "1" at 1080.93,1060 h27.2 r180; Mechanical 7 "4" at 870,790 h27.2 r180; Mechanical 7 "3" at 904.81,1060 h27.2 r180
U3: Mechanical 7 "1" at 2123.74,1712.05 h27.2 r270
U$1: Top Layer "ARDUINO is a registered trademark." at 13235,-1615 h56.1 r90; Top Layer "The product information on the Web Site or Materials is subject to change without notice. Do not finalize a design with this information." at 13115,-1615 h42.5 r90; Top Layer "these for future definition and shall have no responsibility whatsoever for conflicts or incompatibilities arising from future changes to them." at 12995,-1615 h42.5 r90; Top Layer "rely on the absence or characteristics of any features or instructions marked \"reserved\" or \"undefined.\" Arduino reserves" at 12915,-1615 h42.5 r90; Top Layer "Arduino may make changes to specifications and product descriptions at any time, without notice. The Customer must not" at 12835,-1615 h42.5 r90; Top Layer "REGARDING PRODUCTS, INCLUDING BUT NOT LIMITED TO, ANY IMPLIED WARRANTIES OF MERCHANTABILITY OR FITNESS FOR A PARTICULAR PURPOSE" at 12715,-1615 h42.5 r90; Top Layer "Reference Designs ARE PROVIDED \"AS IS\" AND \"WITH ALL FAULTS. Arduino DISCLAIMS ALL OTHER WARRANTIES, EXPRESS OR IMPLIED," at 12635,-1615 h42.5 r90